# Altium PCB EMFI_HCAL.PcbDoc
Units mil, origin at the board's own origin, x right, y up, seen from the top; angles counter-clockwise.
Board outline 3318.97 x 1274.97 mil, 2 copper layers (Top Layer, Bottom Layer); 2 components, 2 nets, 10 pads, 8 vias.
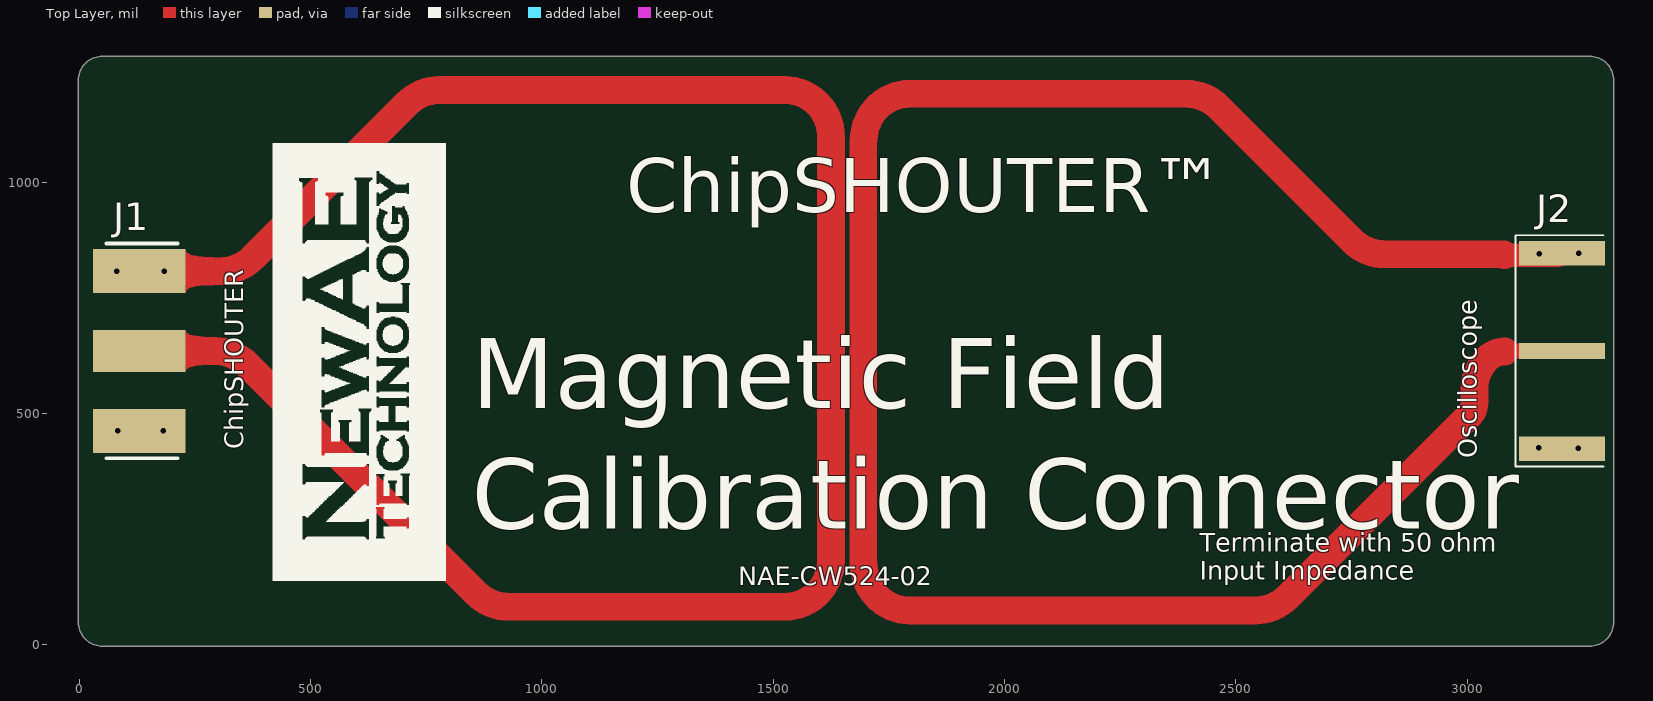
[diagram p0: Top Layer view]
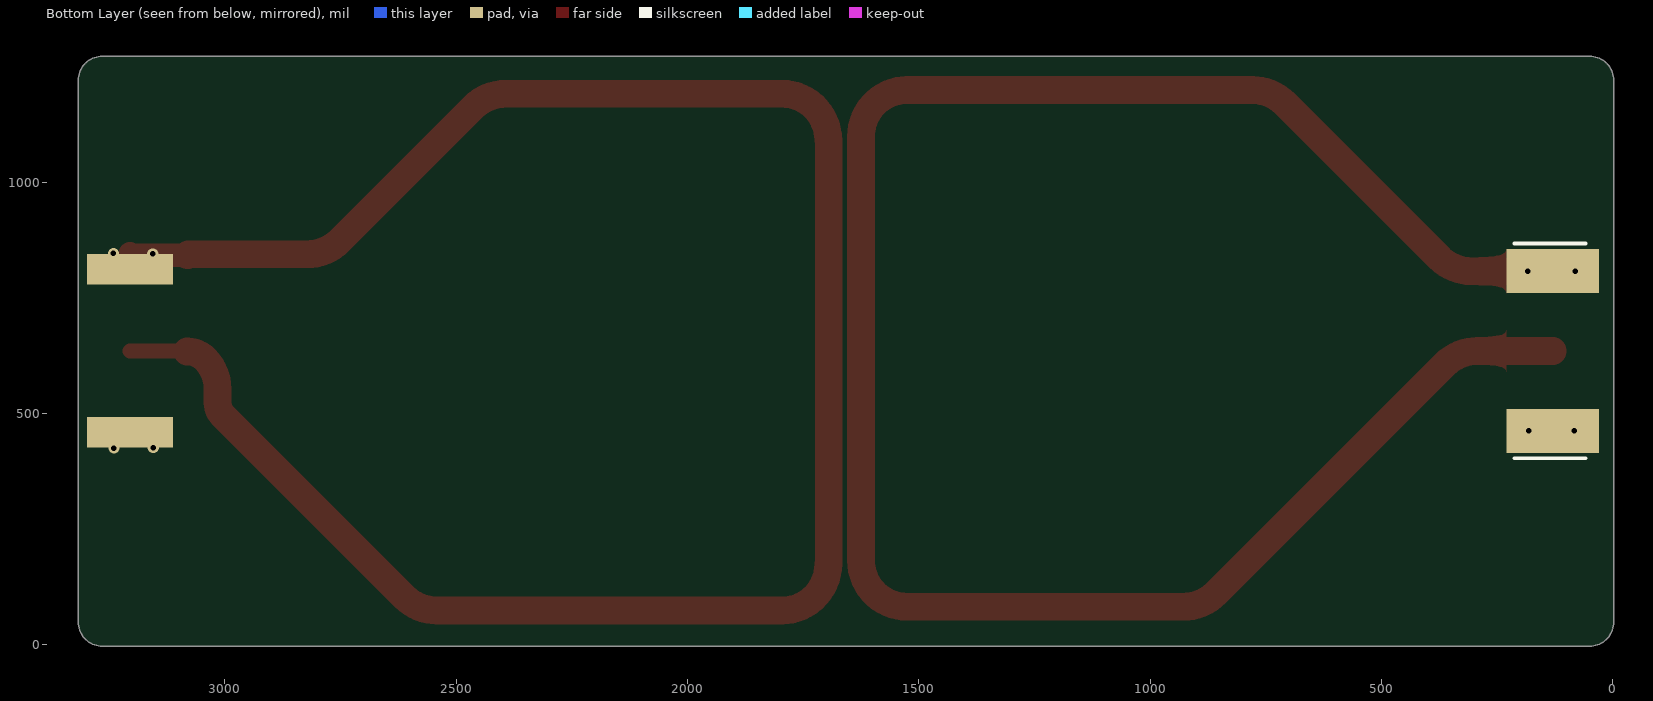
[diagram p1: Bottom Layer view, seen from below]

## Layer stack, top to bottom
Top Solder: solder mask 0.4, Solder Resist, Dk 3.5
Top Layer: signal copper 1.4
Dielectric 1: dielectric 12.6, FR-4, Dk 4.8
Bottom Layer: signal copper 1.4
Bottom Solder: solder mask 0.4, Solder Resist, Dk 3.5

## Board outline
-1.98,49 ccw(c50,49) 50,-2.98 3265,-2.98 ccw(c3265,49) 3316.98,49 3316.98,1220 ccw(c3265,1220) 3265,1271.98 50,1271.98 ccw(c50,1220) -1.98,1220

## Design rules (kind name [scope] priority, off if disabled: settings)
Clearance [All] p1: gap=10 ignorepadtopadclearanceinfootprint=FALSE except(0: Arc-Hole Track-Hole SMDPad-Hole THPad-Hole Via-Hole Fill-Hole Poly-Hole Region-Hole Text-Hole)
PolygonConnect [All] p1: connectstyle=Relief reliefconductorwidth=10 reliefentries=4 polygonreliefangle="90 Angle" airgapwidth=10
RoutingVias [All] p1: holewidth=28 width=50 viastyle="Through Hole" minholewidth=28 minwidth=50 maxholewidth=28 maxwidth=50
SolderMaskExpansion [All] p1: expansion=4
Width [All] p1: maxlimit=100 minlimit=6 preferedwidth=10
30 further rules are at their usual default settings.

## Components (designator, comment, footprint, x,y, rotation, side; value= is the part's Value field where it differs from the comment)
J1 "CON-SMA-PCBEDGE-003.062" CON-SMA-MALE-PCB-EDGE062 130,635 r180 top
J2 "112640" BNC_EDGE_JACK 3205,635 r90 top

## Footprints (in the part's own frame and the unit in brackets; to place one, negate y for a bottom-side part, rotate by r counter-clockwise, add the part's x,y. Pads: shape width x height; smd on the part's side, far side on the other; paste and mask are expansions set on the pad)
BNC_EDGE_JACK [mm]
  rect 0.86x4.72 smd: 1(0,0)
  rect 1.35x4.72 smd: 2(-5.36,0) 3(5.36,0)
  rect 1.675x4.72 smd far side: 4(4.475,0) 5(-4.475,0)
  silkscreen extent -6.35,-2.29 6.35,2.54
CON-SMA-MALE-PCB-EDGE062 [mm]
  rect 5.08x2.29 smd: 1(0,0)
  rect 5.08x2.415 smd: 2(0,-4.383) 5(0,4.383)
  rect 5.08x2.415 smd far side: 3(0,-4.383) 4(0,4.383)
  silkscreen extent -2.1,-5.9 1.8,5.9

## Part data
J1: library part CON-F-SMA-PCBEDGE-003.062, "SMA MaleEdge Mount Connector for 0.062\" Thick Board", Manufacture 1="Linx Technologies", Manufacture Part Number 1=CONSMA013.062, Supplier Part Number 1=CONSMA013.062-ND, Component Group=Connector, ComponentLink1Description="Manufacturer URL", ComponentLink1URL=http://www.linxtechnologies.com/, ComponentLink2Description=Datasheet, ComponentLink2URL=http://www.connectorcity.com/diagrams/SMA/CONSMA003.062.pdf, Component Type=Standard, DatasheetVersion="rev1.0, Aug-2006", PackageDescription="SMA Female Edge Mount Connector for 0.062\" Thick Board, 7.9 mm Body Dia.", PackageReference=CON-SMA-EDGE062, PackageVersion="rev1.0, Aug-2006", Part Number=CON-F-SMA-PCBEDGE-003.062, PCB_Layout="Pads complies with manufacturer's recommendation.", Pin Count=5, Supplier 1=Digi-Key
J2: library part BNC_EDGE_MOUNT, "BNC Connector Jack, Female Socket 50 Ohm Board Edge, End Launch Solder", Manufacture 1="Amphenol RF", Supplier Part Number 1=ACX2259-ND, Component Group=Connector, Component Type=Standard, Manufacture Part Number 1=112640, Part Number=BNC_EDGE_MOUNT, Pin Count=3, PP Material Stack=0, PP Rotation=0, Supplier 1=Digi-Key

## Via types
v1: diameter 24, hole 12, Top Layer to Bottom Layer, tented both sides, 8 vias

## Nets (pads, with @x,y where several pads share a name; then routed paths per layer and width w, separated by ;. In a path a pad name is that pad's centre, name@x,y a point inside that pad or via, vN(x,y) a via of type N, cw(c..) or ccw(c..) an arc to the next point about the centre after c; other vN are vias at no path point)
NetJ1_1: J1.1 J1.2 J1.3 | length 4395.2
  Top Layer w60: J1.1 292.58,635 cw(c292.58,535) 363.29,605.71 857.71,111.29 ccw(c928.42,182) 928.42,82 1525,82 ccw(c1525,182) 1625,182 1625,1099 ccw(c1525,1099) 1525,1199 779.42,1199 ccw(c779.42,1099) 708.71,1169.71 375.83,836.83 cw(c305.12,907.54) 305.12,807.54 J1.2
  other v1: 81,807 184,807
NetJ2_1: J2.1 J2.3 J2.4 | length 4446.6
  Top Layer w20: 3090,636 ccw(c3092.41,638.41) 3092.41,635
  Top Layer w33: 3092.41,635 J2.1
  Top Layer w50: 3081,842 3195.29,842 ccw(c3195.29,855.74) J2.3
  Top Layer w60: 1695,174 1695,1091 ; 1696,174 ccw(c1796,174) 1796,74 2541.58,74 ccw(c2541.58,174) 2612.29,103.29 3003.98,494.98 ccw(c2974.96,524) 3016,524 3016,552.82 cw(c3108.18,552.82) 3043,618 cw(c3081.63,579.37) 3081.63,634 ; 1696,1091 cw(c1796,1091) 1796,1191 2392.58,1191 cw(c2392.58,1091) 2463.29,1161.71 2751.71,873.29 ccw(c2822.42,944) 2822.42,844 3076.17,844 cw(c3076.17,837.17) 3081,842
  other v1: 3156,845 3241,846
pads on no net: J1.4 J1.5 J2.2 J2.5
copper on no net:
  other v1: 3240,425 3155,426 83,463 182,463

## Silkscreen, mask and mechanical layers (free items; w line width, h text height)
Top Overlay:
  drawing of 4 lines, arcs and shapes, not listed
  text "ChipSHOUTER™" at 1182,896 h200
  text "ChipSHOUTER" at 355,423 h40 r90
  text "Oscilloscope" at 3021,403.01 h40 r90
  text "Magnetic Field / Calibration Connector" at 848,201 h260
  text "Terminate with 50 ohm  / Input Impedance" at 2422,141 h40
  text "NAE-CW524-02" at 1425,129 h40
Mechanical 1:
  lines w3.94: 0,156 0,1220 cw(c50,1220) 50,1270 3265,1270 cw(c3265,1220) 3315,1220 3315,49 cw(c3265,49) 3265,-1 50,-1 cw(c50,49) 0,49 0,636